# EAGLE board M_O_ext_bluetooth_BT5011A (EAGLE 9.6.2)
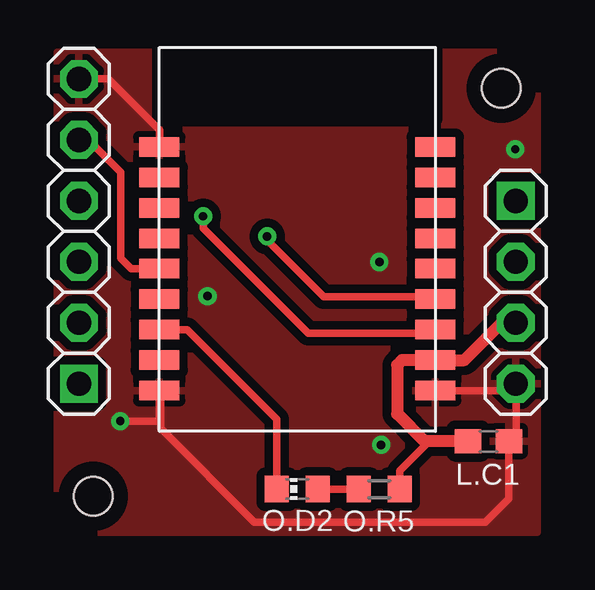
[diagram p0: board, top side]
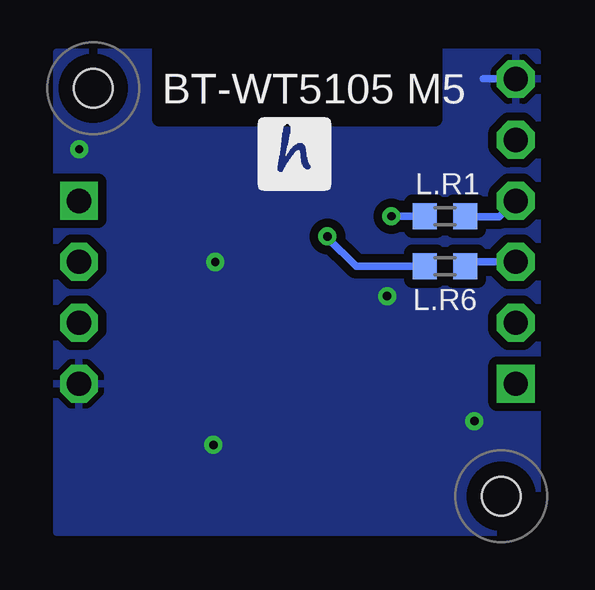
[diagram p1: board, bottom side, seen from below]

No outline drawn. Coordinates in mm, seen from the top.
Copper layers (1*16): Top 0.035mm / dielectric 1.5mm / Bottom 0.035mm
Design rules "default *": minimum track width 12mil, minimum drill 0.35mm, track to track 14mil, track to pad 13mil, pad to pad 10mil, via to via 14mil, smd to smd 14mil, copper to edge 15mil, drill to drill 15mil, minimum pad ring 10mil, minimum via ring 8mil, stop-mask expansion 4mil, vias tented up to drill 0mil, thermal gap 10mil
Holes 1.6 mm at 2,2 19,19
tRestrict: area 18,18 to 20,20; area 1,1 to 3,3
bRestrict: area 1,1 to 3,3; area 18,18 to 20,20

## Footprints (pad centres in the part's own frame; a part is rotated, then mirrored left to right if it is on the bottom)
1X06 = drill 1.016 pad 1.575 square: 1 -6.35,0 | drill 1.016 pad 1.575 octagon: 2 -3.81,0; 3 -1.27,0; 4 1.27,0; 5 3.81,0; 6 6.35,0
1X04 = drill 1.016 pad 1.575 square: 1 -3.81,0 | drill 1.016 pad 1.575 octagon: 2 -1.27,0; 3 1.27,0; 4 3.81,0
C0603 = smd 1.1 x 1: 1 -0.85,0; 2 0.85,0
R0603 = smd 1 x 1.1: 1 -0.85,0; 2 0.85,0
CHIP-LED0603 = smd 1.1 x 1: A1 0,-0.85; C1 0,0.85
E104-BT5011A = smd 1.676 x 0.813: CTS 11.5,8.05; DATA 0,2.97; DISC 0,5.51; GND1 0,11.86; GND2 0,1.7; GND3 11.5,1.7; LINK 0,4.24; MOD 0,8.05; NC11 0,10.59; NC12 0,9.32; RS 11.5,9.32; RTS 11.5,6.78; RXD 11.5,4.24; SWDCLK 11.5,10.59; SWDIO 11.5,11.86; TXD 11.5,5.51; VCC 11.5,2.97; WKP 0,6.78

## Placement (x,y rotation side)
G.J1  [1X06]  1.4,13.04 90 top
G.J2  [1X04]  19.6,10.5 270 top
L.C1  100n  [C0603]  18.47,4.29 180 top
L.R1  2k2  [R0603]  4.34,13.67 0 bottom
L.R6  2k2  [R0603]  4.34,11.58 0 bottom
O.D2  [CHIP-LED0603]  10.5,2.3 90 top
O.R5  2k2  [R0603]  13.91,2.3 0 top
U$1  E104-BT5011A  [E104-BT5011A]  4.75,4.7 0 top

## Library data of the parts
G.J1 G.J2 = pinhead2
L.C1 = rcl; SPICEPREFIX: C
L.R1 L.R6 O.R5 = rcl; SPICEPREFIX: R
O.D2 = led
U$1 = hugo

## Nets
GND: G.J1.6 G.J2.4 L.C1.1 U$1.GND1 U$1.GND2 U$1.GND3
N$1: L.R6.1 U$1.TXD
N$2: G.J1.4 L.R1.2
N$3: L.R1.1 U$1.RXD
N$4: G.J1.5 U$1.WKP
N$6: O.D2.C1 U$1.LINK
N$10: O.D2.A1 O.R5.1
VCC: G.J2.3 L.C1.2 O.R5.2 U$1.VCC
VCC1: G.J1.3 L.R6.2

## Tracks (layer width: path | path; a pad name or v marks a point on that pad's centre or on a via)
GND  (via drill 0.35)
  Top 0.305: G.J1.6 2.63,19.39 4.78,17.25 4.78,16.59 U$1.GND1 | G.J2.4 19.62,6.67 19.62,6.4 | U$1.GND3 19.62,6.4 | v3.12,5.13 4.75,5.13 U$1.GND2 4.8,6.4 4.8,4.83 8.71,0.91 18.34,0.91 19.32,1.89 L.C1.1 19.62,4.29 19.62,6.4
  Bottom 0.305: 2.76,19.39 G.J1.6
  other vias: 19.58,16.46 14,4.14 13.92,11.76 6.76,10.34
  pour Top (isolate 0.305): 0.5,20.5 0.5,0.5 20.5,0.5 20.5,20.5
  pour Bottom (isolate 0.305): 0.5,20.5 0.5,0.5 20.53,0.5 20.53,20.5
N$1  (via drill 0.35)
  Top 0.305: U$1.TXD 16.15,10.31 11.61,10.31 9.25,12.68 v9.25,12.83
  Bottom 0.305: L.R6.1 8.05,11.58 9.25,12.78 v9.25,12.83
N$2
  Bottom 0.305: G.J1.4 1.43,14.31 2.08,13.65 3.48,13.65 L.R1.2
N$3  (via drill 0.35)
  Top 0.305: U$1.RXD 16.1,8.79 10.95,8.79 6.58,13.16 v6.58,13.66
  Bottom 0.305: v6.58,13.66 L.R1.1
N$4
  Top 0.305: G.J1.5 1.79,16.85 3.15,15.49 3.15,11.91 3.58,11.48 U$1.WKP
N$6
  Top 0.305: O.D2.C1 9.65,5.21 5.92,8.94 U$1.LINK
N$10
  Top 0.305: O.D2.A1 O.R5.1
VCC
  Top 0.305: 16.91,7.67 U$1.VCC 16.18,7.59 | O.R5.2 14.76,3.06 16,4.3 16,4.29
  Top 0.508: L.C1.2 16,4.29 15.8,4.29 14.66,5.44 14.66,7.47 14.86,7.67 U$1.VCC 17.46,7.67 19.02,9.23 G.J2.3
VCC1
  Bottom 0.305: L.R6.2 3.31,11.77 G.J1.3

## Text on the board
bPlace: BT-WT5105 M5